# EAGLE board Schematic (EAGLE 7.3.0)
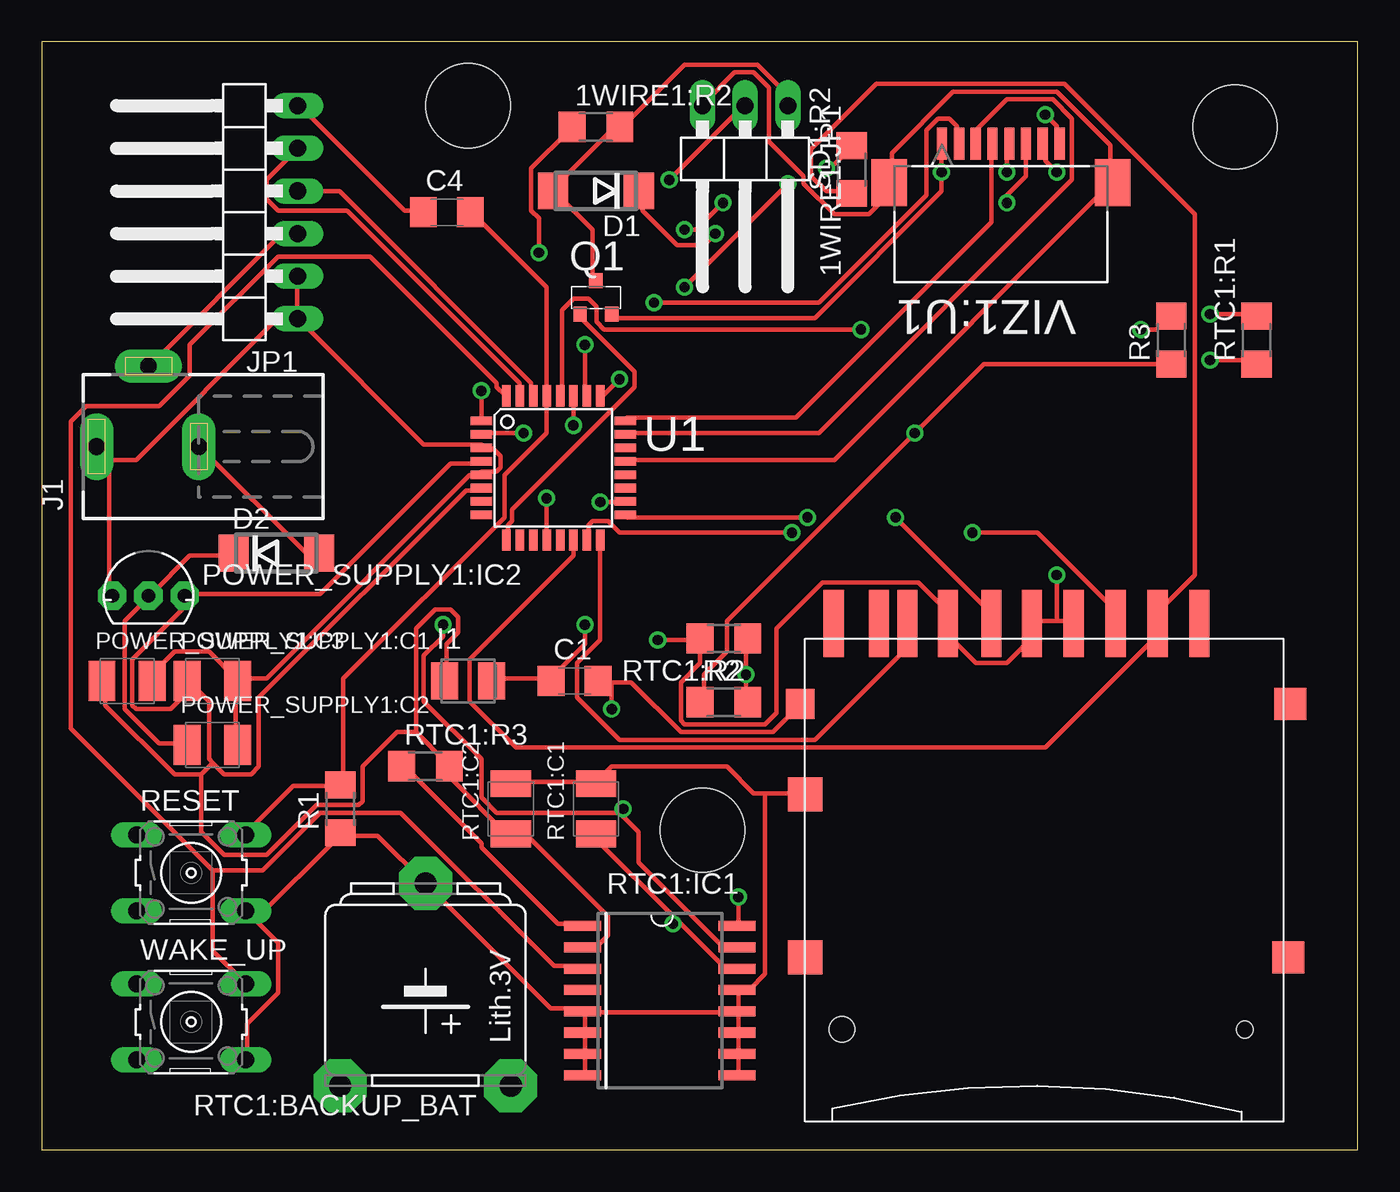
[diagram p0: board, top side]
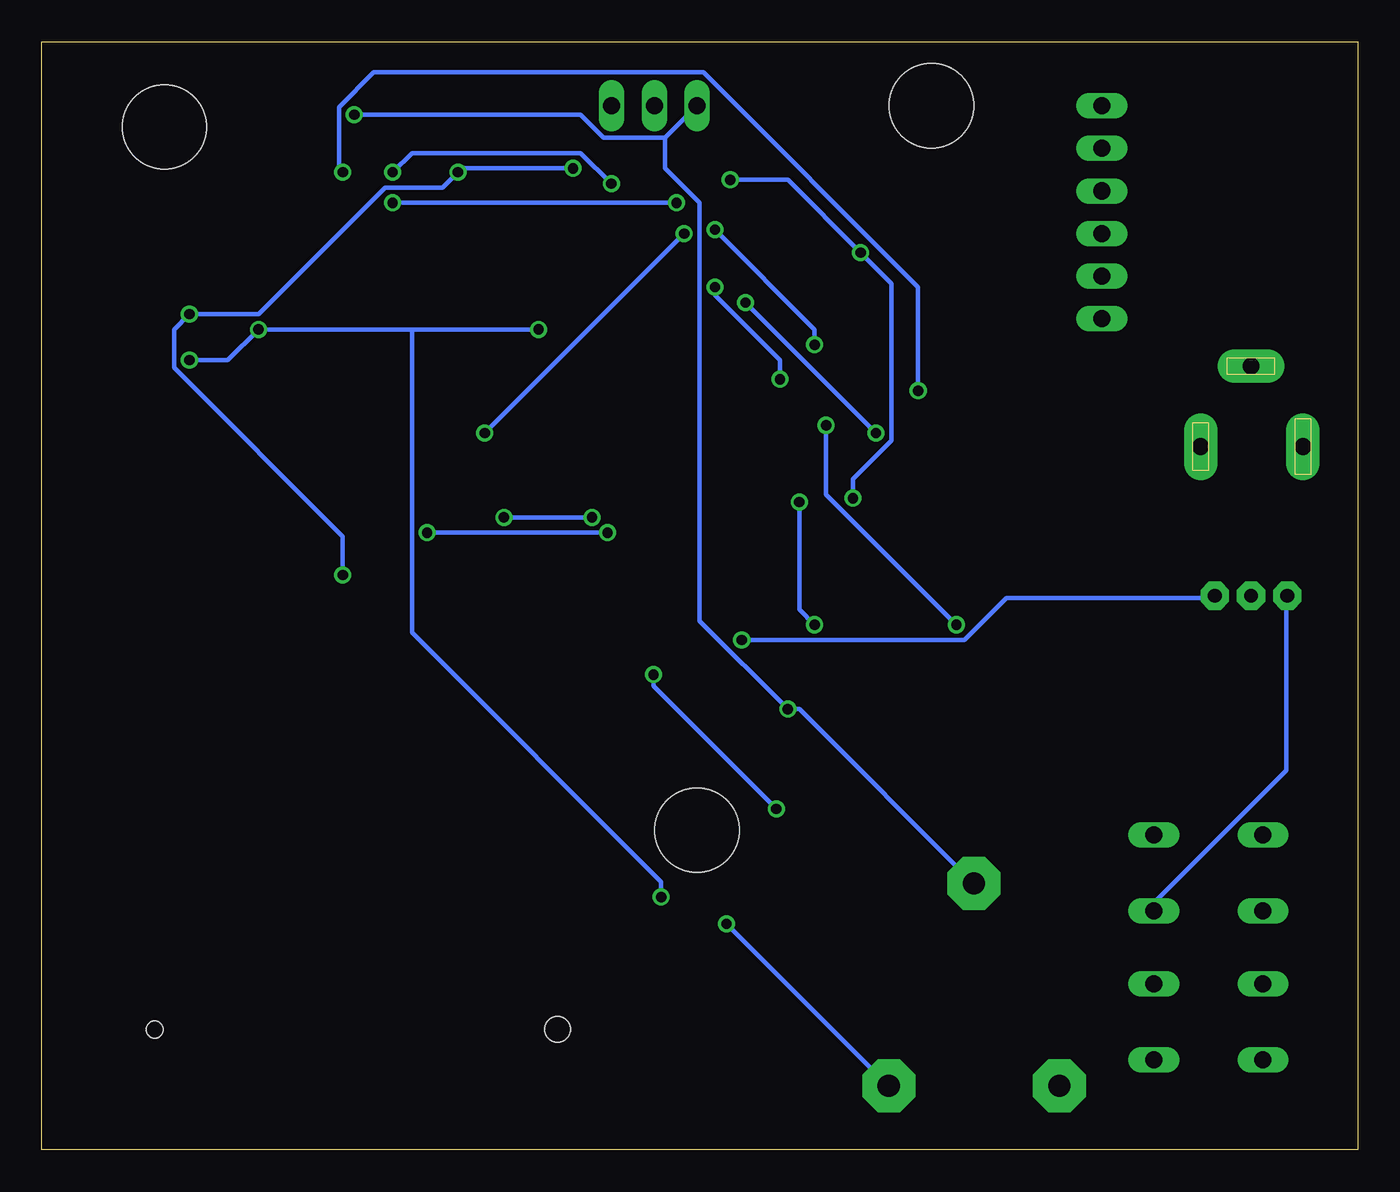
[diagram p1: board, bottom side, seen from below]

Size 78.41 x 66.03 mm. Coordinates in mm from the lower left corner, seen from the top.
Outline: 0,0 78.41,0 78.41,66.03 0,66.03 0,0
Copper layers (1*16): Top 0.035mm / dielectric 1.5mm / Bottom 0.035mm
Design rules "default": minimum track width 10mil, minimum drill 24mil, track to track 8mil, track to pad 8mil, pad to pad 8mil, via to via 8mil, smd to smd 8mil, copper to edge 40mil, drill to drill 8mil, minimum pad ring 10mil, minimum via ring 8mil, stop-mask expansion 4mil, vias tented up to drill 0mil, thermal gap 10mil
Holes 5 mm at 25.4,62.23 71.12,60.96 39.37,19.05

## Footprints (pad centres in the part's own frame; a part is rotated, then mirrored left to right if it is on the bottom)
1X03/90 = drill 1.016 long: 1 -2.54,-3.81; 2 0,-3.81; 3 2.54,-3.81
R1206 = smd 1.6 x 1.803: 1 -1.422,0; 2 1.422,0
C1206 = smd 1.6 x 1.8: 1 -1.4,0; 2 1.4,0
DO214AA = smd 1.8 x 2.2: A 2.55,0; C -2.55,0
L3225M = smd 1.6 x 2.2: 1 -1.4,0; 2 1.4,0
DCJ0202 = drill 1 pad 2 long: 1 0,3.1; 2 4.8,0; 3 0,-3
1X06/90 = drill 1.016 long: 1 -6.35,-3.81; 2 -3.81,-3.81; 3 -1.27,-3.81; 4 1.27,-3.81; 5 3.81,-3.81; 6 6.35,-3.81
SMC_B = smd 1.6 x 2.4: + -1.5,0; - 1.5,0
TO92-INLINE = drill 0.813 pad 1.676 octagon: 1 -2.159,0; 2 0,0; 3 2.159,0
MICRO3 = smd 0.8 x 0.9: 1 -0.95,-1; 2 0.95,-1; 3 0,1
B3F-10XX = drill 1.016 long: 1 -3.251,2.261; 2 3.251,2.261; 3 -3.251,-2.261; 4 3.251,-2.261
CR03N = drill 1.321 pad 3.15 octagon: + -5.08,-5.08; +@1 -5.08,5.08; - 6.985,0
SOIC-16W = smd 0.6 x 2.2: 1 -4.445,-4.6; 2 -3.175,-4.6; 3 -1.905,-4.6; 4 -0.635,-4.6; 5 0.635,-4.6; 6 1.905,-4.6; 7 3.175,-4.6; 8 4.445,-4.6; 9 4.445,4.6; 10 3.175,4.6; 11 1.905,4.6; 12 0.635,4.6; 13 -0.635,4.6; 14 -1.905,4.6; 15 -3.175,4.6; 16 -4.445,4.6
SDCARD = smd 1.2 x 4: 1 6.8,0.89; 2 4.3,0.89; 3 1.8,0.89; 4 -0.7,0.89; 5 -3.1,0.89; 6 -5.7,0.89; 7 -8.1,0.89; 8 -9.8,0.89; 9 9.3,0.89; CD -12.5,0.89 | smd 2.032 x 2.032: COM -14.2,-9.3; WP -14.2,-19 | smd 1.7 x 1.8: MT1 -14.5,-3.91 | smd 1.9 x 1.9: MT2 14.7,-3.91; MT3 14.6,-19.01 | hole 1.5: -12,-23.31 | hole 1: 12,-23.31
TQFP32-08 = smd 1.27 x 0.508: 1 -4.293,2.8; 2 -4.293,2; 3 -4.293,1.2; 4 -4.293,0.4; 5 -4.293,-0.4; 6 -4.293,-1.2; 7 -4.293,-2; 8 -4.293,-2.8; 17 4.293,-2.8; 18 4.293,-2; 19 4.293,-1.2; 20 4.293,-0.4; 21 4.293,0.4; 22 4.293,1.2; 23 4.293,2; 24 4.293,2.8 | smd 0.508 x 1.27: 9 -2.8,-4.293; 10 -2,-4.293; 11 -1.2,-4.293; 12 -0.4,-4.293; 13 0.4,-4.293; 14 1.2,-4.293; 15 2,-4.293; 16 2.8,-4.293; 25 2.8,4.293; 26 2,4.293; 27 1.2,4.293; 28 0.4,4.293; 29 -0.4,4.293; 30 -1.2,4.293; 31 -2,4.293; 32 -2.8,4.293
MOLEX_52207-0885 = smd 0.61 x 1.905: 1 3.505,4.801; 2 2.489,4.801; 3 1.499,4.801; 4 0.508,4.801; 5 -0.508,4.801; 6 -1.499,4.801; 7 -2.489,4.801; 8 -3.505,4.801 | smd 2.108 x 2.794: 9 -6.655,7.137; 10 6.655,7.137

## Placement (x,y rotation side)
1WIRE1:JP1  [1X03/90]  41.91,58.42 180 top
1WIRE1:R2  4,7k  [R1206]  33.02,60.96 0 top
C1  100nF  [C1206]  31.75,27.94 0 top
C4  100nF  [C1206]  24.13,55.88 0 top
D1  [DO214AA]  33.02,57.15 180 top
D2  [DO214AA]  13.97,35.56 0 top
I1  10nH  [L3225M]  25.4,27.94 0 top
J1  DCJ0202  [DCJ0202]  6.35,41.91 90 top
JP1  FTDI friend  [1X06/90]  11.43,55.88 90 top
POWER_SUPPLY1:C1  0.33nF  [SMC_B]  10.16,27.94 0 top
POWER_SUPPLY1:C2  100nF  [SMC_B]  10.16,24.13 0 top
POWER_SUPPLY1:C3  100nF  [SMC_B]  5.08,27.94 0 top
POWER_SUPPLY1:IC2  MCP1700 3302E  [TO92-INLINE]  6.35,33.02 0 top
Q1  IRLML5203  [MICRO3]  33.02,50.8 0 top
R1  1M  [R1206]  17.78,20.32 90 top
R2  10k  [R1206]  40.64,26.67 0 top
R3  10k  [R1206]  67.31,48.26 90 top
RESET  [B3F-10XX]  8.89,16.51 0 top
RTC1:BACKUP_BAT  CR03N  [CR03N]  22.86,8.89 90 top
RTC1:C1  0.1F  [SMC_B]  33.02,20.32 90 top
RTC1:C2  0.1F  [SMC_B]  27.94,20.32 90 top
RTC1:IC1  DS3231SN  [SOIC-16W]  36.83,8.89 270 top
RTC1:R1  10k  [R1206]  72.39,48.26 90 top
RTC1:R2  10k  [R1206]  40.64,30.48 180 top
RTC1:R3  10k  [R1206]  22.86,22.86 0 top
SD1:R2  10k  [R1206]  48.26,58.42 90 top
SD1:U$1  SDMMC18650  [SDCARD]  59.69,30.48 0 top
U1  ATMEGA328P-AU  [TQFP32-08]  30.48,40.64 0 top
VIZ1:U1  52207-0885  [MOLEX_52207-0885]  57.15,64.77 180 top
WAKE_UP  [B3F-10XX]  8.89,7.62 0 top

## Library data of the parts
1WIRE1:JP1 = pinhead; MF: TE CONNECTIVITY / AMP; MPN: 292253-3; OC_FARNELL: 1282936
1WIRE1:R2 = resistor; MF: PANASONIC ELECTRONIC COMPONENTS; MPN: ERJB1AF472U; OC_FARNELL: 2293982RL
C1 C4 POWER_SUPPLY1:C2 POWER_SUPPLY1:C3 = rcl; MF: AVX; MPN: 02016D104KAT2A; OC_FARNELL: 2280755
D1 D2 = diode; OC_FARNELL: unknown
I1 = Element14Parts; MF: TDK; MPN: NLCV32T-100K-PFR; OC_FARNELL: 2112810
J1 = con-jack; OC_FARNELL: unknown; OC_NEWARK: unknown
JP1 = pinhead; OC_FARNELL: unknown; VV: v,,v
POWER_SUPPLY1:C1 = rcl; MF: AVX; MPN: 0201YC331KAT2A; OC_FARNELL: 1327618RL
POWER_SUPPLY1:IC2 = adafruit; MF: MICROCHIP; MPN: MCP1700-3302E/TO; OC_FARNELL: 1296588
Q1 = transistor-power; MF: FAIRCHILD SEMICONDUCTOR; MPN: FDN360P; OC_FARNELL: 9846336
R1 = rcl; MF: VISHAY DRALORIC; MPN: CRCW12061M00FKEA; OC_FARNELL: 1469968
R2 R3 RTC1:R1-RTC1:R3 SD1:R2 = rcl; MF: VISHAY DRALORIC; MPN: CRCW120610K0FKTA; OC_FARNELL: 1653050
RESET WAKE_UP = switch-omron; MF: OMRON ELECTRONIC COMPONENTS; MPN: B3F-1000; OC_FARNELL: 176432; OC_NEWARK: 36M3542
RTC1:BACKUP_BAT = battery; OC_FARNELL: unknown
RTC1:C1 RTC1:C2 = rcl; MF: AVX; MPN: TAJB107K004RNJ; OC_FARNELL: 196988
RTC1:IC1 = DS3231_industrialberry; MF: MAXIM INTEGRATED PRODUCTS; MPN: DS3231SN#; OC_FARNELL: 1593292
SD1:U$1 = adafruit; MF: AMPHENOL COMMERCIAL PRODUCTS; MPN: 101-00565-64; OC_FARNELL: 2135992
U1 = Arduino Dev Parts; MPN: ATMEGA328P-AU; OC_FARNELL: 1715486; OC_NEWARK: 68T2935
VIZ1:U1 = Molex_By_element14_Batch_1; OC_FARNELL: unknown; OC_NEWARK: 07P8553; PACKAGE: SOCKET FPC, SMT, 1MM, 8 WAY; SUPPLIER: Molex

## Nets
A0: U1.23 VIZ1:U1.3
A1: U1.24 VIZ1:U1.4
A2: U1.25 VIZ1:U1.5
A3: U1.26 VIZ1:U1.6
A4: R2.2 RTC1:IC1.15 RTC1:R2.1 U1.27
A5: R3.2 RTC1:IC1.16 RTC1:R1.1 U1.28
AREF: U1.20
AVCC: C1.1 I1.2 U1.18
D2: RTC1:IC1.3 U1.32 WAKE_UP.2
D3: U1.1 VIZ1:U1.7
D4: U1.2 VIZ1:U1.2
D5: Q1.1 U1.9
D8: 1WIRE1:JP1.2 1WIRE1:R2.1 U1.12
D10: SD1:R2.1 SD1:U$1.1 U1.14
D11: SD1:U$1.2 U1.15
D12: SD1:U$1.7 U1.16
D13: SD1:U$1.5 U1.17
DTR: C4.1 JP1.6
GND: 1WIRE1:JP1.3 C1.2 J1.1 JP1.1 JP1.2 POWER_SUPPLY1:C1.- POWER_SUPPLY1:C2.- POWER_SUPPLY1:C3.- POWER_SUPPLY1:IC2.1 R1.1 RESET.4 RTC1:BACKUP_BAT.- RTC1:C1.- RTC1:C2.- RTC1:IC1.5 RTC1:IC1.6 RTC1:IC1.7 RTC1:IC1.8 RTC1:IC1.9 RTC1:IC1.10 RTC1:IC1.11 RTC1:IC1.12 RTC1:IC1.13 SD1:U$1.COM SD1:U$1.MT1 U1.3 U1.5 U1.21 VIZ1:U1.8 VIZ1:U1.9 VIZ1:U1.10 WAKE_UP.4
N$1: D2.A J1.3
N$2: D2.C POWER_SUPPLY1:C2.+ POWER_SUPPLY1:IC2.2
N$17: D1.C R2.1 R3.1
RESET: C4.2 R1.2 RESET.2 U1.29
RTC1:32KHZ: RTC1:IC1.1 RTC1:R3.1
RTC1:VBAT: RTC1:BACKUP_BAT.+ RTC1:C1.+ RTC1:IC1.14
RX: JP1.5 U1.31
SD1:CD: SD1:U$1.CD
SD1:WRITE_PROTECT: SD1:U$1.WP
TX: JP1.4 U1.30
VCC: I1.1 POWER_SUPPLY1:C1.+ POWER_SUPPLY1:C3.+ POWER_SUPPLY1:IC2.3 Q1.2 RTC1:C2.+ RTC1:IC1.2 RTC1:R1.2 RTC1:R2.2 RTC1:R3.2 SD1:R2.2 SD1:U$1.3 SD1:U$1.4 SD1:U$1.6 U1.4 U1.6 VIZ1:U1.1
VCC5V: J1.2 JP1.3
VSS_SWITCHED: 1WIRE1:JP1.1 1WIRE1:R2.2 D1.A Q1.3

## Tracks (layer width: path | path; a pad name or v marks a point on that pad's centre or on a via)
A0
  Top 0.254: U1.23 34.87,42.72 46.3,42.72 61.39,57.81 61.39,61.47 60.25,62.61 57.51,62.61 55.68,60.78 55.68,60.1 VIZ1:U1.3
A1
  Top 0.254: U1.24 34.87,43.64 44.93,43.64 56.59,55.3 56.59,59.87 VIZ1:U1.4
A2  (via drill 0.61)
  Top 0.254: v34.42,45.92 33.5,45.01 U1.25 | v44.48,57.58 v38.3,51.41 | v57.51,58.27 57.51,59.87 VIZ1:U1.5
  Bottom 0.254: v34.42,45.92 34.42,47.07 38.3,50.95 v38.3,51.41 | v44.48,57.58 46.3,59.41 56.36,59.41 v57.51,58.27
A3  (via drill 0.61)
  Top 0.254: v32.36,47.98 32.36,45.01 U1.26 | v38.3,54.84 38.99,54.84 v40.59,56.44 | v57.51,56.44 57.51,56.9 58.65,58.04 VIZ1:U1.6
  Bottom 0.254: v32.36,47.98 32.36,48.9 v38.3,54.84 | v57.51,56.44 v40.59,56.44
A4  (via drill 0.61)
  Top 0.254: R2.2 41.96,26.72 v41.96,28.32 41.96,30.38 RTC1:R2.1 | v31.67,43.18 31.67,44.78 U1.27 | v23.9,31.29 23.9,30.61 22.76,29.46 22.76,26.72 26.19,23.29 26.19,21.01 27.1,20.09 34.42,20.09 | 34.42,20.09 35.56,18.95 35.56,17.12 40.59,12.09 41.28,12.09 RTC1:IC1.15 | 34.42,20.09 v34.65,20.32
  Bottom 0.254: v31.67,43.18 31.67,39.06 v23.9,31.29 | v41.96,28.32 41.96,27.63 v34.65,20.32
A5  (via drill 0.61)
  Top 0.254: v48.82,48.9 33.5,48.9 33.05,49.35 33.05,50.27 32.59,50.72 31.67,50.72 30.99,50.04 30.99,45.01 U1.28 | v65.51,48.9 66.42,48.9 67.11,49.58 R3.2 | v69.62,47.07 72.36,47.07 RTC1:R1.1 | v41.5,15.06 41.5,13.46 RTC1:IC1.16
  Bottom 0.254: 56.36,48.9 v65.51,48.9 67.33,47.07 v69.62,47.07 | 56.36,48.9 v48.82,48.9 | v41.5,15.06 41.5,15.98 56.36,30.84 56.36,48.9
AVCC  (via drill 0.61)
  Top 0.254: v33.27,38.61 34.65,38.61 U1.18 | v32.36,31.29 32.36,30.15 30.3,28.09 | 30.3,28.09 26.87,28.09 I1.2 | 30.3,28.09 C1.1
  Bottom 0.254: v33.27,38.61 33.27,32.21 v32.36,31.29
D2
  Top 0.254: 10.18,16.66 1.73,25.12 1.73,43.41 2.64,44.32 6.98,44.32 8.81,46.15 8.81,47.98 14.07,53.24 19.56,53.24 27.1,45.7 27.1,45.47 27.56,45.01 U1.32 | 10.18,16.66 10.18,11.86 12.01,10.03 WAKE_UP.2 | 10.18,16.66 13.16,16.66 16.59,20.09 21.39,20.09 30.53,10.95 32.13,10.95 RTC1:IC1.3
D3  (via drill 0.61)
  Top 0.254: v26.19,45.24 U1.1 | v60.48,58.27 59.79,58.95 59.79,59.87 VIZ1:U1.7
  Bottom 0.254: v26.19,45.24 26.19,51.41 38.99,64.21 58.65,64.21 60.71,62.15 60.71,58.5 v60.48,58.27
D4  (via drill 0.61)
  Top 0.254: v28.7,42.72 26.19,42.72 U1.2 | v36.47,50.5 46.3,50.5 52.71,56.9 52.71,60.78 53.39,61.47 54.08,61.47 54.53,61.01 54.53,60.1 VIZ1:U1.2
  Bottom 0.254: v36.47,50.5 v28.7,42.72
D5
  Top 0.254: Q1.1 32.13,49.58 35.33,46.38 35.33,45.47 28.02,38.15 28.02,37.47 27.79,37.24 27.79,36.55 U1.9
D8  (via drill 0.61)
  Top 0.254: v30.07,38.84 30.07,36.55 U1.12 | v29.62,53.47 29.62,55.52 29.16,55.98 29.16,58.5 31.45,60.78 1WIRE1:R2.1 | v37.39,57.81 41.73,62.15 1WIRE1:JP1.2
  Bottom 0.254: v30.07,38.84 30.07,39.98 27.79,42.27 27.79,51.64 v29.62,53.47 33.96,57.81 v37.39,57.81
D10
  Top 0.254: U1.14 31.67,36.32 31.67,35.41 25.5,29.23 25.5,26.72 28.25,23.98 59.79,23.98 66.42,30.61 66.42,31.29 SD1:U$1.1 66.65,31.52 66.65,32.21 68.71,34.27 68.71,55.75 60.94,63.53 49.73,63.53 45.85,59.64 45.85,58.04 46.76,57.12 48.13,57.12 SD1:R2.1
D11  (via drill 0.61)
  Top 0.254: v44.7,36.78 34.42,36.78 33.73,37.47 32.82,37.47 32.59,37.24 32.59,36.55 U1.15 | v55.45,36.78 59.33,36.78 63.91,32.21 63.91,31.52 SD1:U$1.2
  Bottom 0.254: v55.45,36.78 v44.7,36.78
D12
  Top 0.254: U1.16 33.27,36.32 33.27,30.38 31.9,29.01 31.9,26.95 34.42,24.44 46.08,24.44 51.56,29.92 51.56,31.29 SD1:U$1.7
D13  (via drill 0.61)
  Top 0.254: v45.62,37.69 34.87,37.69 U1.17 | v50.88,37.69 56.36,32.21 56.36,31.52 SD1:U$1.5
  Bottom 0.254: v50.88,37.69 v45.62,37.69
DTR
  Top 0.254: C4.1 22.53,55.98 21.61,55.98 15.44,62.15 JP1.6
GND  (via drill 0.61)
  Top 0.254: 4.01,41.12 4.01,33.12 POWER_SUPPLY1:IC2.1 | 4.01,41.12 3.33,41.81 J1.1 4.01,41.12 | POWER_SUPPLY1:C3.- 6.76,28.09 6.76,28.55 7.9,29.69 9.96,29.69 11.56,28.09 POWER_SUPPLY1:C1.- | POWER_SUPPLY1:C2.- 11.56,24.21 11.56,27.86 POWER_SUPPLY1:C1.- | JP1.1 15.44,49.35 22.76,42.04 26.19,42.04 U1.3 26.19,41.81 26.87,41.81 27.33,41.35 27.33,40.66 27.1,40.44 26.19,40.44 U1.5 26.19,40.21 25.5,40.21 13.39,28.09 11.79,28.09 POWER_SUPPLY1:C1.- | JP1.2 15.21,51.87 15.21,49.58 JP1.1 | 4.01,41.12 5.61,41.12 13.84,49.35 15.21,49.35 JP1.1 | v59.79,61.7 60.48,61.01 60.48,60.1 VIZ1:U1.8 | U1.21 34.87,41.12 47.22,41.12 63.68,57.58 VIZ1:U1.9 63.68,57.81 63.68,59.87 60.48,63.07 54.3,63.07 50.65,59.41 50.65,57.81 VIZ1:U1.10 50.42,57.58 50.42,56.9 49.28,55.75 47.22,55.75 45.39,57.58 45.39,58.04 43.33,60.1 43.33,63.3 42.42,64.21 41.28,64.21 39.45,62.38 1WIRE1:JP1.3 | 43.1,21.23 42.42,21.23 40.82,22.84 33.96,22.84 33.05,21.92 RTC1:C1.- 32.82,21.92 28.02,21.92 RTC1:C2.- | 43.1,21.23 45.39,21.23 SD1:U$1.COM | RTC1:IC1.8 32.36,4.55 32.36,5.69 RTC1:IC1.7 32.36,5.92 32.36,6.83 RTC1:IC1.6 32.36,7.06 32.36,8.2 | RTC1:IC1.12 41.5,8.43 41.5,9.35 RTC1:IC1.13 41.5,9.58 42.19,9.58 43.1,10.49 43.1,21.23 | RTC1:IC1.9 41.5,4.55 41.5,5.69 RTC1:IC1.10 41.5,5.92 41.5,6.83 RTC1:IC1.11 41.5,7.06 41.5,8.2 RTC1:IC1.12 | 32.36,8.2 41.28,8.2 RTC1:IC1.12 | 32.36,8.2 RTC1:IC1.5 32.13,8.43 30.3,8.43 RTC1:BACKUP_BAT.- 20.02,18.72 17.96,18.72 R1.1 17.73,18.72 12.7,13.69 | 33.96,27.86 35.1,27.86 38.08,24.89 43.56,24.89 45.16,26.49 SD1:U$1.MT1 | 33.96,27.86 33.27,27.86 C1.2 | RESET.4 12.7,13.69
  Top 0.254: 12.7,13.69 14.07,12.32 14.07,9.35 12.24,7.52 12.24,5.46 WAKE_UP.4 | v33.96,26.26 33.96,27.86
  Bottom 0.254: v59.79,61.7 46.3,61.7 44.93,60.33 41.28,60.33 | 1WIRE1:JP1.3 41.28,60.33 | RTC1:BACKUP_BAT.- 22.99,15.98 33.27,26.26 v33.96,26.26 39.22,31.52 39.22,56.44 41.28,58.5 41.28,60.33 | POWER_SUPPLY1:IC2.1 4.24,32.89 4.24,22.61 12.01,14.83 12.01,14.38 RESET.4
N$1
  Top 0.254: D2.A 16.36,35.64 15.67,35.64 9.5,41.81 J1.3
N$2
  Top 0.254: D2.C 11.33,35.41 8.81,35.41 6.53,33.12 POWER_SUPPLY1:IC2.2 6.3,32.89 4.93,31.52 4.93,26.26 6.98,24.21 8.59,24.21 POWER_SUPPLY1:C2.+
N$17  (via drill 0.61)
  Top 0.254: R2.1 39.45,26.72 39.45,28.32 40.82,29.69 40.82,31.52 v52.02,42.72 56.13,46.84 67.11,46.84 R3.1 | v40.13,54.61 39.45,53.92 37.85,53.92 35.79,55.98 35.79,57.12 D1.C
  Bottom 0.254: v52.02,42.72 v40.13,54.61
RESET
  Top 0.254: RESET.2 12.24,18.95 14.99,21.69 17.73,21.69 R1.2 17.96,21.92 17.96,28.09 27.56,37.69 27.56,40.21 30.07,42.72 30.07,44.78 U1.29 30.07,45.01 30.07,51.41 25.73,55.75 C4.2
RTC1:32KHZ
  Top 0.254: RTC1:R3.1 21.61,22.84 26.19,18.26 26.19,18.03 30.76,13.46 32.13,13.46 RTC1:IC1.1
RTC1:VBAT  (via drill 0.61)
  Top 0.254: 37.85,13.69 32.82,18.72 RTC1:C1.+ | 37.85,13.69 40.59,10.95 41.28,10.95 RTC1:IC1.14 | 37.85,13.69 v37.62,13.46
  Bottom 0.254: v37.62,13.46 28.02,3.86 RTC1:BACKUP_BAT.+
RX
  Top 0.254: U1.31 28.47,45.01 28.47,45.7 18.19,55.98 14.07,55.98 13.39,56.67 13.39,57.81 15.21,59.64 JP1.5
TX
  Top 0.254: U1.30 29.16,45.01 29.16,45.7 17.73,57.12 15.44,57.12 JP1.4
VCC  (via drill 0.61)
  Top 0.254: 22.3,24.89 22.3,31.06 23.44,32.21 24.36,32.21 24.82,31.75 24.82,30.84 24.13,30.15 24.13,28.09 I1.1 | 22.3,24.89 24.13,23.06 RTC1:R3.2 24.36,22.84 24.36,22.15 27.79,18.72 RTC1:C2.+ 28.02,18.72 28.93,18.72 33.73,13.92 33.73,12.78 33.05,12.09 32.36,12.09 RTC1:IC1.2 | U1.4 26.19,40.89 24.36,40.89 16.59,33.12 8.59,33.12 POWER_SUPPLY1:IC2.3 8.36,32.89 8.36,32.21 5.38,29.23 5.38,26.49 5.61,26.26 7.67,26.26 9.04,27.63 | 10.18,23.06 9.96,23.29 9.96,26.72 9.04,27.63 | 10.18,23.06 10.87,22.38 12.47,22.38 12.93,22.84 12.93,26.95 25.27,39.29 26.19,39.29 U1.6 | 9.04,27.63 8.81,27.86 POWER_SUPPLY1:C1.+ 9.04,27.63 | 9.5,22.38 7.9,22.38 3.79,26.49 3.79,27.86 POWER_SUPPLY1:C3.+ | 10.18,23.06 9.5,22.38 | 22.3,24.89 21.16,24.89 19.1,22.84 19.1,20.78 18.87,20.55 16.36,20.55 13.39,17.58 10.87,17.58 9.5,18.95 9.5,22.38 | 60.48,31.52 61.39,31.52 SD1:U$1.3 | 60.48,31.52 59.11,31.52 SD1:U$1.4 58.88,31.29 58.88,30.38 57.51,29.01 55.68,29.01 54.08,30.61 54.08,31.29 SD1:U$1.6 53.85,31.52 53.85,32.21 52.25,33.81 46.53,33.81 43.79,31.06 43.79,26.04 43.1,25.35 38.3,25.35 38.08,25.58 38.08,27.86 39.22,29.01 39.22,30.38 | Q1.2 34.19,49.58 46.08,49.58 53.62,57.12 v53.62,58.27 53.62,59.87 VIZ1:U1.1 | v46.76,58.5 46.99,58.5 48.13,59.64 SD1:R2.2 | v69.62,49.81 72.36,49.81 RTC1:R1.2 | v60.48,34.27 60.48,31.52 | 39.22,30.38 v36.7,30.38 | 39.22,30.38 RTC1:R2.2
  Bottom 0.254: v46.76,58.5 53.39,58.5 v53.62,58.27 54.53,57.35 57.96,57.35 65.51,49.81 v69.62,49.81 70.54,48.9 70.54,46.61 60.48,36.55 v60.48,34.27 | v36.7,30.38 23.44,30.38 20.93,32.89 8.59,32.89 POWER_SUPPLY1:IC2.3
VCC5V
  Top 0.254: JP1.3 14.3,54.61 6.53,46.84 J1.2
VSS_SWITCHED
  Top 0.254: Q1.3 32.82,51.87 32.82,54.84 30.53,57.12 D1.A 30.53,57.35 33.96,60.78 34.42,60.78 1WIRE1:R2.2 34.65,61.01 38.3,64.67 42.65,64.67 44.25,63.07 44.25,62.38 1WIRE1:JP1.1